# Altium PCB PCB1.PcbDoc
Units mil, origin at the board's own origin, x right, y up, seen from the top; angles counter-clockwise.
Board outline 4204.92 x 2700 mil, 2 copper layers (Top Layer, Bottom Layer); 92 components, 0 nets, 373 pads, 0 vias.
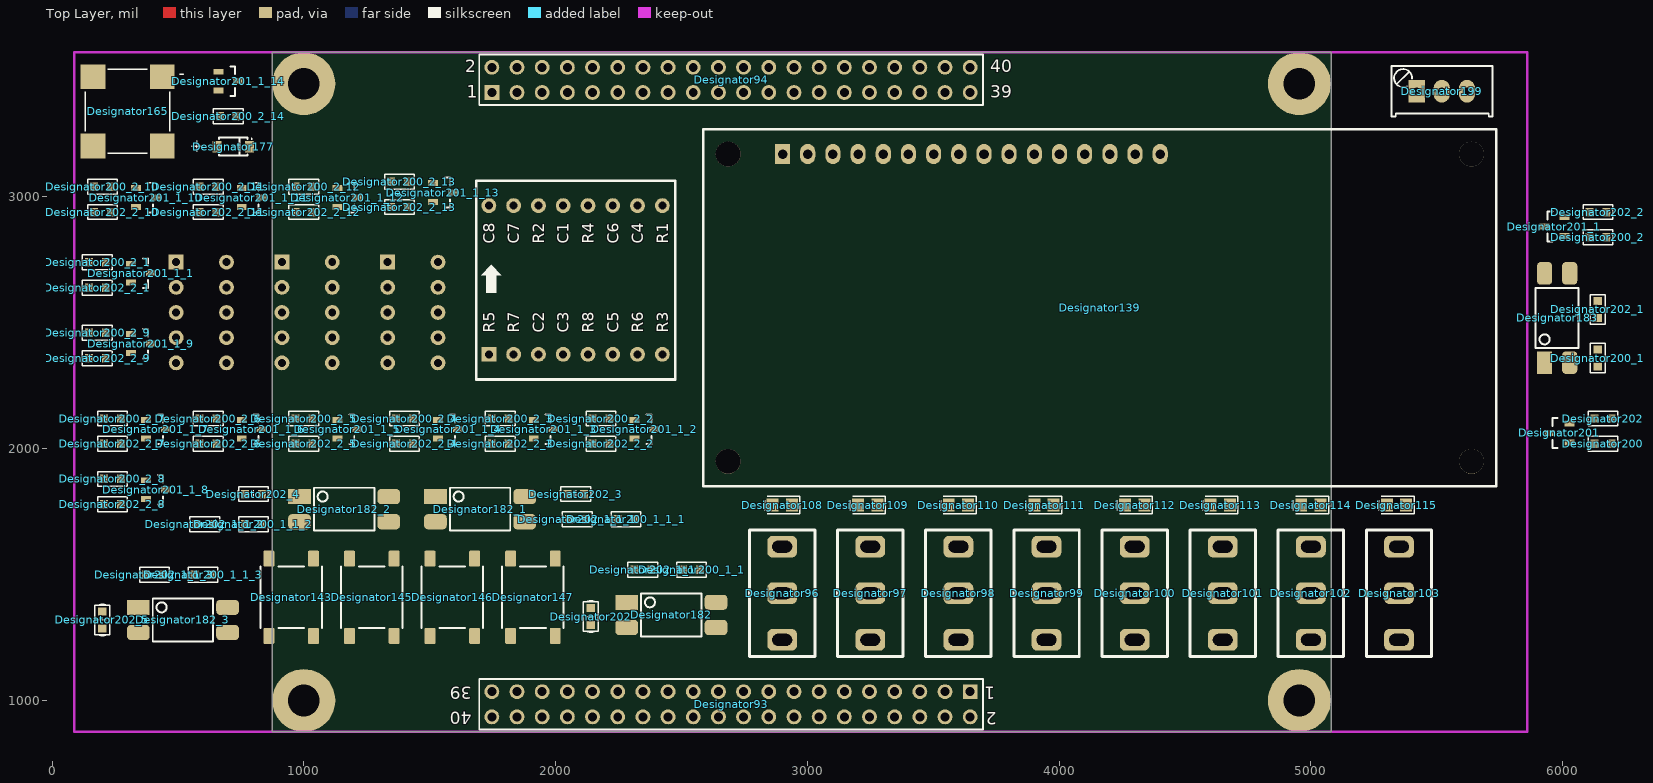
[diagram p0: Top Layer view]
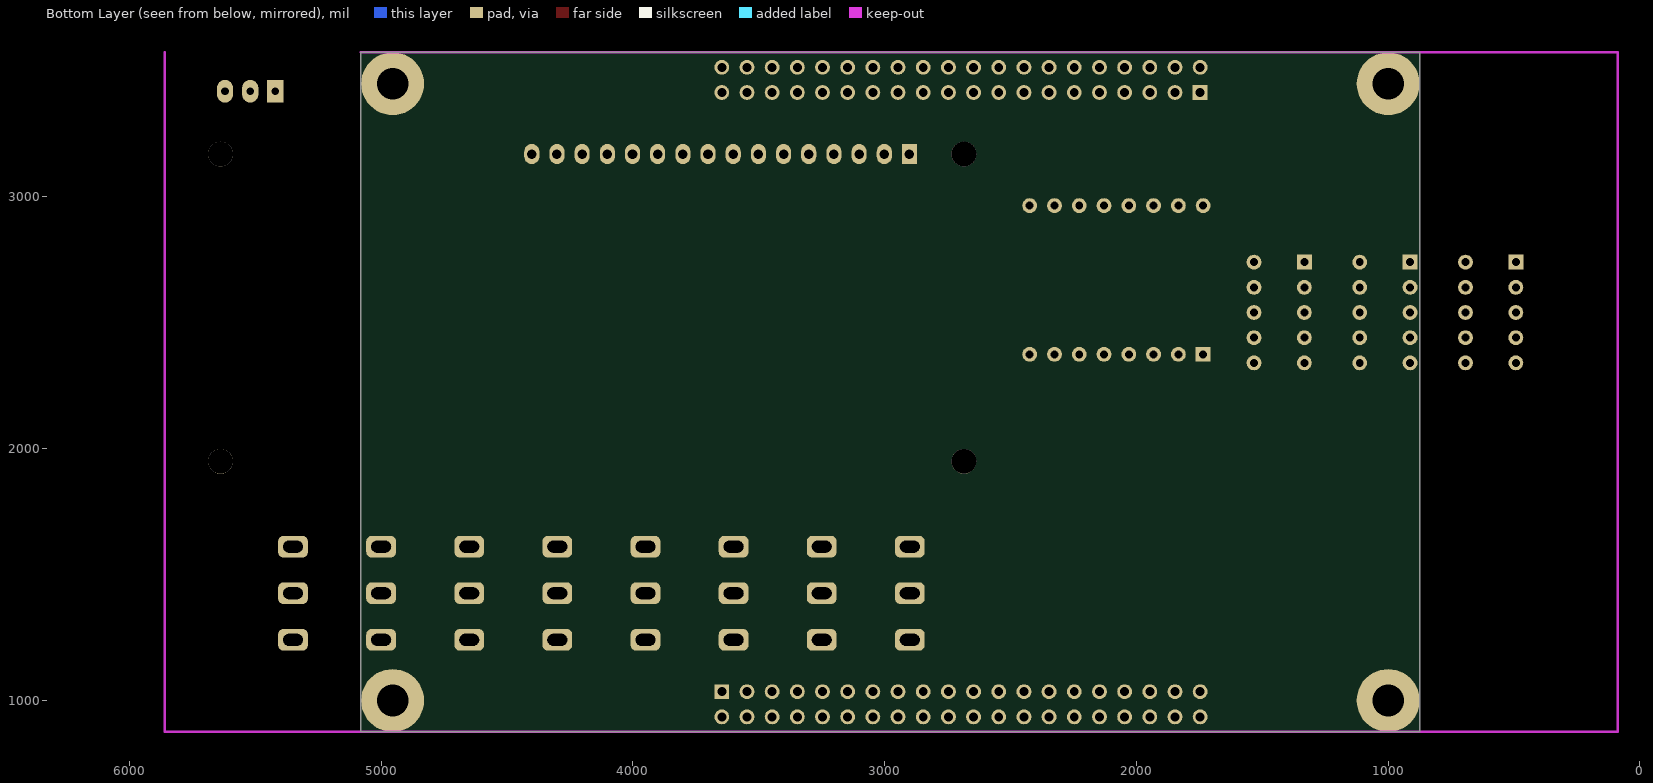
[diagram p1: Bottom Layer view, seen from below]

## Layer stack, top to bottom
Top Solder: solder mask 0.4, Solder Resist, Dk 3.5
Top Layer: signal copper 1.4
Dielectric 1: dielectric 12.6, FR-4, Dk 4.8
Bottom Layer: signal copper 1.4
Bottom Solder: solder mask 0.4, Solder Resist, Dk 3.5

## Board outline
875,875 5079.92,875 5079.92,3575 875,3575

## Design rules (kind name [scope] priority, off if disabled: settings)
Clearance [All] p1: gap=15 ignorepadtopadclearanceinfootprint=FALSE except(0: Arc-Hole Track-Hole SMDPad-Hole THPad-Hole Via-Hole Fill-Hole Poly-Hole Region-Hole Text-Hole; 10: Arc-Text Track-Text SMDPad-SMDPad SMDPad-Text THPad-Text Via-Text Fill-Text Poly-Text Region-Text Text-Text; 20: Arc-Poly Arc-Region Track-Poly Track-Region SMDPad-Poly SMDPad-Region THPad-THPad THPad-Poly THPad-Region Via-Via Via-Poly Via-Region Fill-Poly Fill-Region Poly-Poly Poly-Region Region-Region)
PolygonConnect [All] p1: connectstyle=Relief reliefconductorwidth=10 reliefentries=4 polygonreliefangle="90 Angle" airgapwidth=10
RoutingVias [All] p1: holewidth=28 width=50 viastyle="Through Hole" minholewidth=28 minwidth=50 maxholewidth=28 maxwidth=50
SolderMaskExpansion [All] p1: expansion=4 istentingtop=FALSE
Width [All] p1: maxlimit=10 minlimit=10 preferedwidth=10
30 further rules are at their usual default settings.

## Components (designator, comment, footprint, x,y, rotation, side; value= is the part's Value field where it differs from the comment)
Designator93 "Comment" HDR2X20 3646.85,1035 r180 top
Designator94 "Comment" HDR2X20 1746.85,3415 r0 top locked
Designator96 "Comment" SW/3/SPDT/SS12D10 2900,1426 r270 top
Designator97 "Comment" SW/3/SPDT/SS12D10 3250,1426 r270 top
Designator98 "Comment" SW/3/SPDT/SS12D10 3600,1426 r270 top
Designator99 "Comment" SW/3/SPDT/SS12D10 3950,1426 r270 top
Designator100 "Comment" SW/3/SPDT/SS12D10 4300,1426 r270 top
Designator101 "Comment" SW/3/SPDT/SS12D10 4650,1426 r270 top
Designator102 "Comment" SW/3/SPDT/SS12D10 5000,1426 r270 top
Designator103 "Comment" SW/3/SPDT/SS12D10 5350,1426 r270 top
Designator108 "Comment" "Led 0805" 2900,1776 r0 top
Designator109 "Comment" "Led 0805" 3240,1776 r0 top
Designator110 "Comment" "Led 0805" 3600,1776 r0 top
Designator111 "Comment" "Led 0805" 3940,1776 r0 top
Designator112 "Comment" "Led 0805" 4300,1776 r0 top
Designator113 "Comment" "Led 0805" 4640,1776 r0 top
Designator114 "Comment" "Led 0805" 5000,1776 r0 top
Designator115 "Comment" "Led 0805" 5340,1776 r0 top
Designator139 "Comment" "LCD 16x2" 2901.54,3170.47 r0 top
Designator143 "Comment" SW/4/SMD/XS 950,1410 r270 top
Designator145 "Comment" SW/4/SMD/XS 1270,1410 r270 top
Designator146 "Comment" SW/4/SMD/XS 1590,1410 r270 top
Designator147 "Comment" SW/4/SMD/XS 1910,1410 r270 top
Designator165 "Comment" CUI_CMT-8530S-SMT 300,3340 r0 top
Designator177 "Comment" SOD123 720,3200 r0 top
Designator182 "Comment" "SOP4 - PC817" 2460,1340 r0 top
Designator182_1 "Comment" "SOP4 - PC817" 1700,1760 r0 top
Designator182_2 "Comment" "SOP4 - PC817" 1160,1760 r0 top
Designator182_3 "Comment" "SOP4 - PC817" 520,1320 r0 top
Designator183 "Comment" "SOP4 - PC817" 5977.99,2519.26 r90 top
Designator199 "Comment" VR1 5420,3420 r0 top
Designator200 "Comment" "R 0603" 6160,2020 r0 top
Designator200_1 "Comment" "R 0603" 6140,2360 r90 top
Designator200_1_1 "Comment" "R 0603" 2540,1520 r180 top
Designator200_1_1_1 "Comment" "R 0603" 2280,1720 r180 top
Designator200_1_1_2 "Comment" "R 0603" 800,1700 r180 top
Designator200_1_1_3 "Comment" "R 0603" 600,1500 r180 top
Designator200_2 "Comment" "R 0603" 6140,2840 r0 top
Designator200_2_1 "Comment" "R 0603" 180,2740 r180 top
Designator200_2_2 "Comment" "R 0603" 2180,2120 r180 top
Designator200_2_3 "Comment" "R 0603" 1780,2120 r180 top
Designator200_2_4 "Comment" "R 0603" 1400,2120 r180 top
Designator200_2_5 "Comment" "R 0603" 1000,2120 r180 top
Designator200_2_6 "Comment" "R 0603" 620,2120 r180 top
Designator200_2_7 "Comment" "R 0603" 240,2120 r180 top
Designator200_2_8 "Comment" "R 0603" 240,1880 r180 top
Designator200_2_9 "Comment" "R 0603" 180,2460 r180 top
Designator200_2_10 "Comment" "R 0603" 200,3040 r180 top
Designator200_2_11 "Comment" "R 0603" 620,3040 r180 top
Designator200_2_12 "Comment" "R 0603" 1000,3040 r180 top
Designator200_2_13 "Comment" "R 0603" 1380,3060 r180 top
Designator200_2_14 "Comment" "R 0603" 700,3320 r180 top
Designator201 "Comment" SOT-23 5987.17,2062.6 r180 top
Designator201_1 "Comment" SOT-23 5967.17,2882.6 r180 top
Designator201_1_1 "Comment" SOT-23 352.83,2697.4 r0 top
Designator201_1_2 "Comment" SOT-23 2352.83,2077.4 r0 top
Designator201_1_3 "Comment" SOT-23 1952.83,2077.4 r0 top
Designator201_1_4 "Comment" SOT-23 1572.83,2077.4 r0 top
Designator201_1_5 "Comment" SOT-23 1172.83,2077.4 r0 top
Designator201_1_6 "Comment" SOT-23 792.83,2077.4 r0 top
Designator201_1_7 "Comment" SOT-23 412.83,2077.4 r0 top
Designator201_1_8 "Comment" SOT-23 412.83,1837.4 r0 top
Designator201_1_9 "Comment" SOT-23 352.83,2417.4 r0 top
Designator201_1_10 "Comment" SOT-23 372.83,2997.4 r0 top
Designator201_1_11 "Comment" SOT-23 792.83,2997.4 r0 top
Designator201_1_12 "Comment" SOT-23 1172.83,2997.4 r0 top
Designator201_1_13 "Comment" SOT-23 1552.83,3017.4 r0 top
Designator201_1_14 "Comment" SOT-23 700,3460 r0 top
Designator202 "Comment" "C 0603" 2140,1333.46 r270 top
Designator202 "Comment" "R 0603" 6160,2120 r0 top
Designator202_1 "Comment" "R 0603" 6140,2553.46 r90 top
Designator202_1_1 "Comment" "R 0603" 2346.54,1520 r180 top
Designator202_1_1_1 "Comment" "R 0603" 2086.54,1720 r180 top
Designator202_1_1_2 "Comment" "R 0603" 606.54,1700 r180 top
Designator202_1_1_3 "Comment" "R 0603" 406.54,1500 r180 top
Designator202_2 "Comment" "R 0603" 6140,2940 r0 top
Designator202_2_1 "Comment" "R 0603" 180,2640 r180 top
Designator202_2_2 "Comment" "R 0603" 2180,2020 r180 top
Designator202_2_3 "Comment" "R 0603" 1780,2020 r180 top
Designator202_2_4 "Comment" "R 0603" 1400,2020 r180 top
Designator202_2_5 "Comment" "R 0603" 1000,2020 r180 top
Designator202_2_6 "Comment" "R 0603" 620,2020 r180 top
Designator202_2_7 "Comment" "R 0603" 240,2020 r180 top
Designator202_2_8 "Comment" "R 0603" 240,1780 r180 top
Designator202_2_9 "Comment" "R 0603" 180,2360 r180 top
Designator202_2_10 "Comment" "R 0603" 200,2940 r180 top
Designator202_2_11 "Comment" "R 0603" 620,2940 r180 top
Designator202_2_12 "Comment" "R 0603" 1000,2940 r180 top
Designator202_2_13 "Comment" "R 0603" 1380,2960 r180 top
Designator202_3 "Comment" "C 0603" 2080,1820 r180 top
Designator202_4 "Comment" "C 0603" 800,1820 r180 top
Designator202_5 "Comment" "C 0603" 200,1320 r270 top

## Footprints (in the part's own frame and the unit in brackets; to place one, negate y for a bottom-side part, rotate by r counter-clockwise, add the part's x,y. Pads: shape width x height; smd on the part's side, far side on the other; paste and mask are expansions set on the pad)
"C 0603" [mm] "Chip Capacitor, 2-Leads, Body 1.6x0.8mm, IPC Medium Density"
  rect 0.8x0.85 smd: 1(-0.85,0) 2(0.85,0)
  silkscreen extent -1.6,-0.75 1.6,0.75, body extent -0.8,-0.43 0.8,0.43, height 0.81
CUI_CMT-8530S-SMT [mm]
  rect 2.5x2.5 smd: 1(-3.5,3.5) 2(-3.5,-3.5) N(3.5,3.5) P(3.5,-3.5)
  silkscreen extent -4.25,-4.25 4.25,4.25, body extent -4.25,-4.25 4.25,4.25, height 3
HDR2X20 [mm] "Connector; Header; 20x2 Position"
  rect 1.5x1.5 hole 0.9: 1(0,0)
  round 1.5 hole 0.9: 2(0,2.54) 3(2.54,0) 4(2.54,2.54) 5(5.08,0) 6(5.08,2.54) 7(7.62,0) 8(7.62,2.54) 9(10.16,0) 10(10.16,2.54) 11(12.7,0) 12(12.7,2.54) 13(15.24,0) 14(15.24,2.54) 15(17.78,0) 16(17.78,2.54) 17(20.32,0) 18(20.32,2.54) 19(22.86,0) 20(22.86,2.54) 21(25.4,0) 22(25.4,2.54) 23(27.94,0) 24(27.94,2.54) 25(30.48,0) 26(30.48,2.54) 27(33.02,0) 28(33.02,2.54) 29(35.56,0) 30(35.56,2.54) 31(38.1,0) 32(38.1,2.54) 33(40.64,0) 34(40.64,2.54) 35(43.18,0) 36(43.18,2.54) 37(45.72,0) 38(45.72,2.54) 39(48.26,0) 40(48.26,2.54)
  silkscreen extent -1.27,-1.27 49.53,3.81, body extent -1.42,-1.27 49.68,3.73, height 8.5
"LCD 16x2" [mil]
  rect 60x80 / inner round 60 / far side rect 60x80 hole 38: 1(0,0)
  oval 60x80 / inner round 60 / far side oval 60x80 hole 38: 2(100,0) 3(200,0) 4(300,0) 5(400,0) 6(500,0) 7(600,0) 8(700,0) 9(800,0) 10(900,0) 11(1000,0) 12(1100,0) 13(1200,0) 14(1300,0) 15(1400,0) 16(1500,0)
  round 98.43 hole 98.43: HOLE(-216.54,0) HOLF(2736.22,0) HOLG(2736.22,-1220.47) HOLH(-216.54,-1220.47)
  silkscreen extent -315,-1319 2835,98, body extent -315,-1319 2835,98, height 433
"Led 0805" [mm] "Led SMD 0805"
  rect 1.2x1.3 smd: 1(-0.975,0) 2(0.975,0)
  silkscreen extent -1.78,-0.89 1.78,0.89, body extent -1.01,-0.64 1.01,0.61, height 1.1
"R 0603" [mm] "Chip Resistor, 2-Leads, Body 1.6x0.8mm, IPC Medium Density"
  rect 0.8x0.85 smd: 1(-0.85,0) 2(0.85,0)
  silkscreen extent -1.5,-0.75 1.5,0.75, body extent -0.8,-0.4 0.8,0.4, height 0.5
SOD123 [mm] "Molded Diode, 2-Leads, Body 2.7x1.6mm, IPC Medium Density"
  rect 0.91x1.143 smd: 1(-1.64,0) 2(1.64,0)
  silkscreen extent -1.45,-0.9 1.9,0.9, body extent -1.85,-0.78 1.85,0.77, height 1.35
"SOP4 - PC817" [mil]
  rect 90x60 smd: 1(-177.17,50)
  rrect50% 90x60 smd: 2(-177.17,-50) 3(177.17,-50) 4(177.17,50)
  silkscreen extent -120,-85 120,85, body extent -197,-90 197,90, height 151
SOT-23 [mm] "SOT23, 3-Leads, Body 3.0x2.5mm (max), Pitch 0.95mm, IPC Medium Density"
  rect 1x0.6 smd: 1(-1,0.95) 2(-1,-0.95) 3(1,0)
  silkscreen extent 0.2,-1.5 0.7,1.5, body extent -1.28,-1.46 1.27,1.46, height 0.95
SW/3/SPDT/SS12D10 [mm]
  rrect50% 2.2x3 hole 1.2 slot 2 at 90 deg: 1(-4.7,0) 2(0,0) 3(4.7,0)
  silkscreen extent -6.4,-3.3 6.4,3.3, body extent -6.4,-3.3 6.35,3.8, height 12.5
SW/4/SMD/XS [mm]
  rrect20% 1.6x1.1 smd: 1(-3.9,-2.25) 1(3.9,-2.25) 2(-3.9,2.25) 2(3.9,2.25)
  silkscreen extent -3.1,-3.1 3.1,3.1, body extent -4.5,-3 4.5,3, height 7
VR1 [mil] "Variable Resistor"
  rect 65x90 hole 30: 1(0,0)
  oval 65x90 hole 30: 2(100,0) 3(200,0)
  silkscreen extent -100,-100 301,100, body extent -87,-94 289,96, height 455

## Free pads (board coordinates)
  rect 59.06x59.06 hole 31.5: 1(493,2741) 1(913,2741) 1(1333,2741) 1(1735,2375)
  round 59.06 hole 31.5: 2(493,2641) 2(913,2641) 2(1333,2641) 2(1833.43,2375) 3(493,2541) 3(913,2541) 3(1333,2541) 3(1931.85,2375) 4(493,2441) 4(913,2441) 4(1333,2441) 4(2030.28,2375) 5(493,2341) 5(913,2341) 5(1333,2341) 5(2128.7,2375) 6(693,2341) 6(1113,2341) 6(1533,2341) 6(2227.13,2375) 7(693,2441) 7(1113,2441) 7(1533,2441) 7(2325.55,2375) 8(693,2541) 8(1113,2541) 8(1533,2541) 8(2423.98,2375) 9(693,2641) 9(1113,2641) 9(1533,2641) 9(2423.98,2965.55) 10(693,2741) 10(1113,2741) 10(1533,2741) 10(2325.55,2965.55) 11(2227.13,2965.55) 12(2128.7,2965.55) 13(2030.28,2965.55) 14(1931.85,2965.55) 15(1833.43,2965.55) 16(1735,2965.55)
  round 250 hole 125.98: ""(1000,1000) ""(1000,3450) ""(4954.33,1000) ""(4954.33,3450)

## Nets (pads, with @x,y where several pads share a name; then routed paths per layer and width w, separated by ;. In a path a pad name is that pad's centre, name@x,y a point inside that pad or via, vN(x,y) a via of type N, cw(c..) or ccw(c..) an arc to the next point about the centre after c; other vN are vias at no path point)
pads on no net: Designator93.1 Designator93.2 Designator93.3 Designator93.4 Designator93.5 Designator93.6 Designator93.7 Designator93.8 Designator93.9 Designator93.10 Designator93.11 Designator93.12 Designator93.13 Designator93.14 Designator93.15 Designator93.16 Designator93.17 Designator93.18 Designator93.19 Designator93.20 Designator93.21 Designator93.22 Designator93.23 Designator93.24 Designator93.25 Designator93.26 Designator93.27 Designator93.28 Designator93.29 Designator93.30 Designator93.31 Designator93.32 Designator93.33 Designator93.34 Designator93.35 Designator93.36 Designator93.37 Designator93.38 Designator93.39 Designator93.40 Designator94.1 Designator94.2 Designator94.3 Designator94.4 Designator94.5 Designator94.6 Designator94.7 Designator94.8 Designator94.9 Designator94.10 Designator94.11 Designator94.12 Designator94.13 Designator94.14 Designator94.15 Designator94.16 Designator94.17 Designator94.18 Designator94.19 Designator94.20 Designator94.21 Designator94.22 Designator94.23 Designator94.24 Designator94.25 Designator94.26 Designator94.27 Designator94.28 Designator94.29 Designator94.30 Designator94.31 Designator94.32 Designator94.33 Designator94.34 Designator94.35 Designator94.36 Designator94.37 Designator94.38 Designator94.39 Designator94.40 Designator96.1 Designator96.2 Designator96.3 Designator97.1 Designator97.2 Designator97.3 Designator98.1 Designator98.2 Designator98.3 Designator99.1 Designator99.2 Designator99.3 Designator100.1 Designator100.2 Designator100.3 Designator101.1 Designator101.2 Designator101.3 Designator102.1 Designator102.2 Designator102.3 Designator103.1 Designator103.2 Designator103.3 Designator108.1 Designator108.2 Designator109.1 Designator109.2 Designator110.1 Designator110.2 Designator111.1 Designator111.2 Designator112.1 Designator112.2 Designator113.1 Designator113.2 Designator114.1 Designator114.2 Designator115.1 Designator115.2 Designator139.1 Designator139.2 Designator139.3 Designator139.4 Designator139.5 Designator139.6 Designator139.7 Designator139.8 Designator139.9 Designator139.10 Designator139.11 Designator139.12 Designator139.13 Designator139.14 Designator139.15 Designator139.16 Designator139.HOLE Designator139.HOLF Designator139.HOLG Designator139.HOLH Designator143.1 Designator143.2 Designator145.1 Designator145.2 Designator146.1 Designator146.2 Designator147.1 Designator147.2 Designator165.1 Designator165.2 Designator165.N Designator165.P Designator177.1 Designator177.2 Designator182.1 Designator182.2 Designator182.3 Designator182.4 Designator182_1.1 Designator182_1.2 Designator182_1.3 Designator182_1.4 Designator182_2.1 Designator182_2.2 Designator182_2.3 Designator182_2.4 Designator182_3.1 Designator182_3.2 Designator182_3.3 Designator182_3.4 Designator183.1 Designator183.2 Designator183.3 Designator183.4 Designator199.1 Designator199.2 Designator199.3 Designator200.1 Designator200.2 Designator200_1.1 Designator200_1.2 Designator200_1_1.1 Designator200_1_1.2 Designator200_1_1_1.1 Designator200_1_1_1.2 Designator200_1_1_2.1 Designator200_1_1_2.2 Designator200_1_1_3.1 Designator200_1_1_3.2 Designator200_2.1 Designator200_2.2 Designator200_2_1.1 Designator200_2_1.2 Designator200_2_2.1 Designator200_2_2.2 Designator200_2_3.1 Designator200_2_3.2 Designator200_2_4.1 Designator200_2_4.2 Designator200_2_5.1 Designator200_2_5.2 Designator200_2_6.1 Designator200_2_6.2 Designator200_2_7.1 Designator200_2_7.2 Designator200_2_8.1 Designator200_2_8.2 Designator200_2_9.1 Designator200_2_9.2 Designator200_2_10.1 Designator200_2_10.2 Designator200_2_11.1 Designator200_2_11.2 Designator200_2_12.1 Designator200_2_12.2 Designator200_2_13.1 Designator200_2_13.2 Designator200_2_14.1 Designator200_2_14.2 Designator201.1 Designator201.2 Designator201.3 Designator201_1.1 Designator201_1.2 Designator201_1.3 Designator201_1_1.1 Designator201_1_1.2 Designator201_1_1.3 Designator201_1_2.1 Designator201_1_2.2 Designator201_1_2.3 Designator201_1_3.1 Designator201_1_3.2 Designator201_1_3.3 Designator201_1_4.1 Designator201_1_4.2 Designator201_1_4.3 Designator201_1_5.1 Designator201_1_5.2 Designator201_1_5.3 Designator201_1_6.1 Designator201_1_6.2 Designator201_1_6.3 Designator201_1_7.1 Designator201_1_7.2 Designator201_1_7.3 Designator201_1_8.1 Designator201_1_8.2 Designator201_1_8.3 Designator201_1_9.1 Designator201_1_9.2 Designator201_1_9.3 Designator201_1_10.1 Designator201_1_10.2 Designator201_1_10.3 Designator201_1_11.1 Designator201_1_11.2 Designator201_1_11.3 Designator201_1_12.1 Designator201_1_12.2 Designator201_1_12.3 Designator201_1_13.1 Designator201_1_13.2 Designator201_1_13.3 Designator201_1_14.1 Designator201_1_14.2 Designator201_1_14.3 Designator202.1 Designator202.2 Designator202_1.1 Designator202_1.2 Designator202_1_1.1 Designator202_1_1.2 Designator202_1_1_1.1 Designator202_1_1_1.2 Designator202_1_1_2.1 Designator202_1_1_2.2 Designator202_1_1_3.1 Designator202_1_1_3.2 Designator202_2.1 Designator202_2.2 Designator202_2_1.1 Designator202_2_1.2 Designator202_2_2.1 Designator202_2_2.2 Designator202_2_3.1 Designator202_2_3.2 Designator202_2_4.1 Designator202_2_4.2 Designator202_2_5.1 Designator202_2_5.2 Designator202_2_6.1 Designator202_2_6.2 Designator202_2_7.1 Designator202_2_7.2 Designator202_2_8.1 Designator202_2_8.2 Designator202_2_9.1 Designator202_2_9.2 Designator202_2_10.1 Designator202_2_10.2 Designator202_2_11.1 Designator202_2_11.2 Designator202_2_12.1 Designator202_2_12.2 Designator202_2_13.1 Designator202_2_13.2 Designator202_3.1 Designator202_3.2 Designator202_4.1 Designator202_4.2 Designator202_5.1 Designator202_5.2

## Keep-outs
Top Layer:
  lines w10: 5080,3575 5860,3575
Keep-Out Layer:
  lines w10: 5080,3575 88,3575 88,875 5080,875 5860,875 5860,3575

## Silkscreen, mask and mechanical layers (free items; w line width, h text height)
Top Overlay:
  region: 1765,2620 1725,2620 1725,2690 1705,2690 1745,2730 1785,2690 1765,2690
  lines w10: 1685,2275 2475,2275 2475,3065 1685,3065 1685,2275
  text "C8" at 1758,2814.13 h45 r90
  text "C7" at 1856.43,2814.13 h45 r90
  text "R2" at 1954.85,2814.13 h45 r90
  text "C1" at 2053.28,2814.13 h45 r90
  text "R4" at 2151.7,2814.13 h45 r90
  text "C6" at 2250.13,2814.13 h45 r90
  text "C4" at 2348.55,2814.13 h45 r90
  text "R1" at 2446.98,2814.13 h45 r90
  text "R5" at 1758,2460.43 h45 r90
  text "R7" at 1856.43,2460.43 h45 r90
  text "C2" at 1954.85,2460.43 h45 r90
  text "C3" at 2053.28,2460.43 h45 r90
  text "R8" at 2151.7,2460.43 h45 r90
  text "C5" at 2250.13,2460.43 h45 r90
  text "R6" at 2348.55,2460.43 h45 r90
  text "R3" at 2446.98,2460.43 h45 r90

## Text inside footprints (layer, text, board x,y; h text height)
Designator93: Top Overlay "1" at 3746.85,1055 h50 r180; Top Overlay "2" at 3751.7,954.23 h50 r180; Top Overlay "40" at 1666.85,955 h50 r180; Top Overlay "39" at 1666.85,1055 h50 r180
Designator94: Top Overlay "39" at 3726.85,3395 h50; Top Overlay "40" at 3726.85,3495 h50; Top Overlay "2" at 1642,3495.77 h50; Top Overlay "1" at 1646.85,3395 h50
Designator165: Top Overlay "-" at 503.17,3466.78 h50; Top Overlay "+" at 546.25,3177.28 h50.04